# EAGLE board ATESLEME (EAGLE 9.6.2)
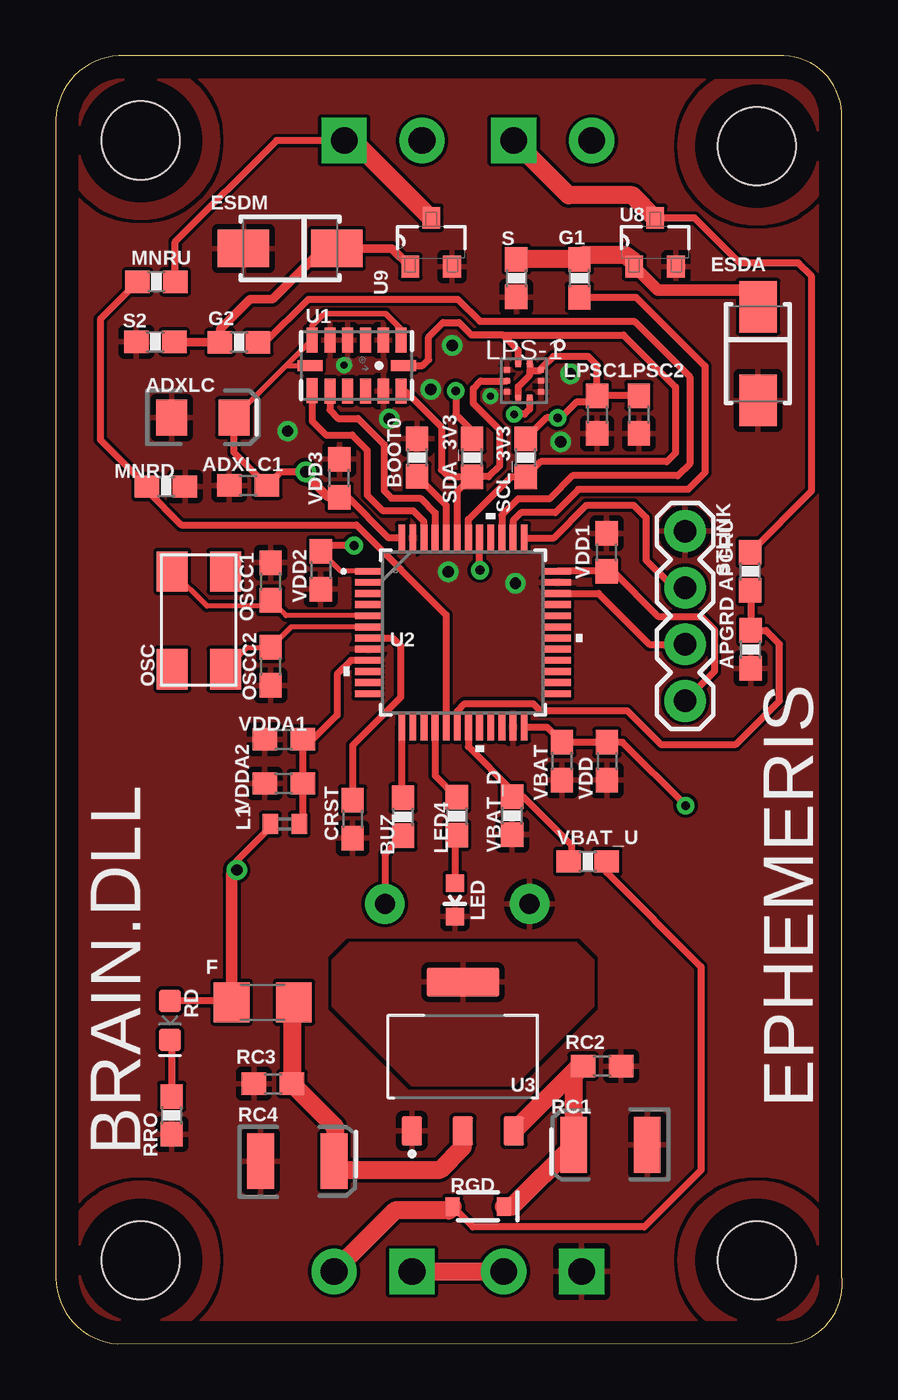
[diagram p0: board, top side]
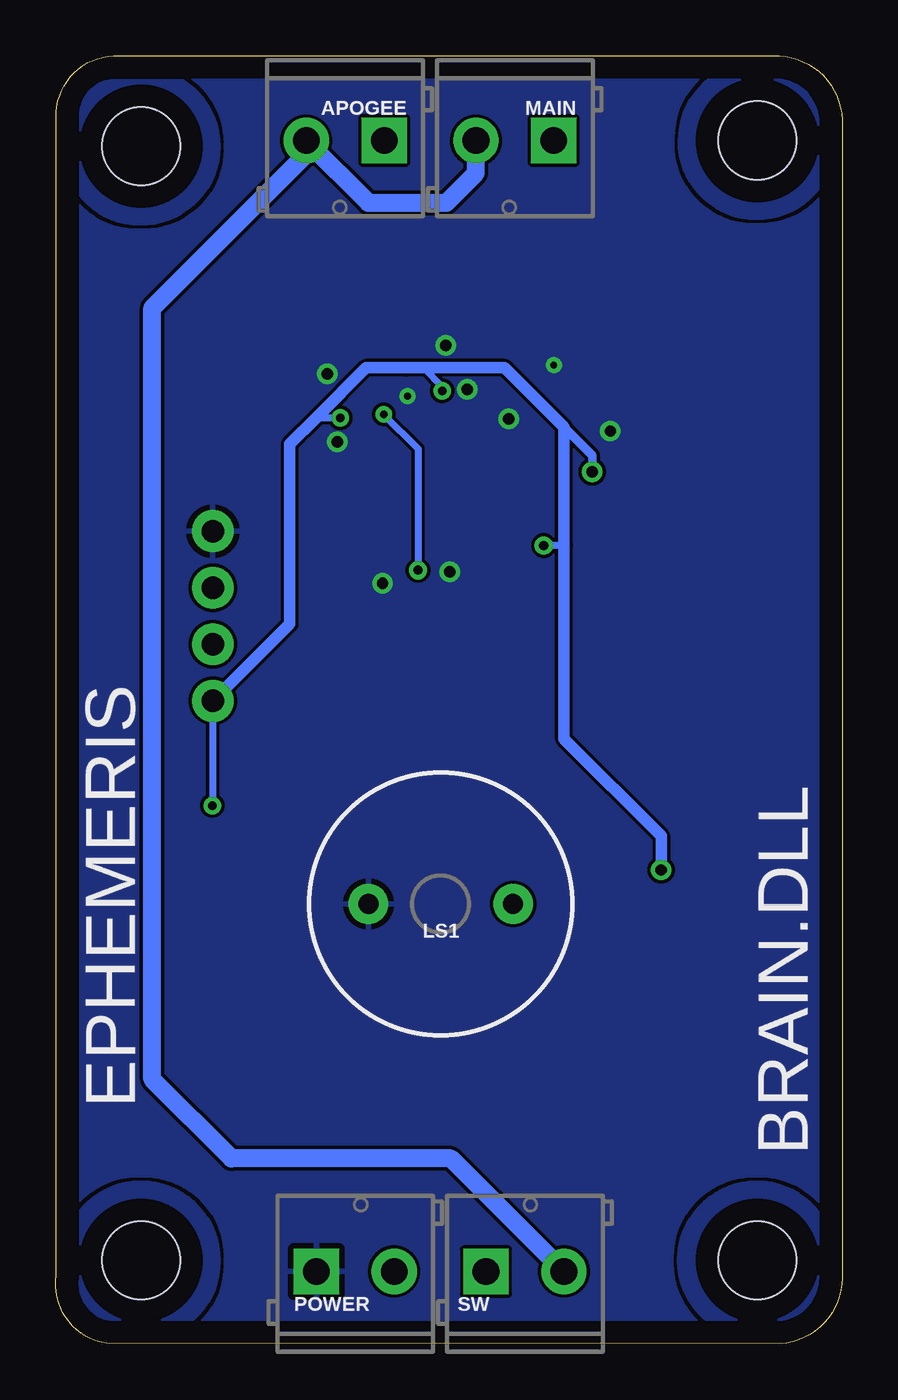
[diagram p1: board, bottom side, seen from below]

Size 35.34 x 57.86 mm. Coordinates in mm from the lower left corner, seen from the top.
Outline: 0.01,54.99 0.01,3.23 arc90 2.78,0 33.05,0.03 arc90 35.31,3.07 35.31,55.07 arc90 32.72,57.86 3.11,57.86 arc90 0.01,54.99
Copper layers (1*16): Top 0.035mm / dielectric 1.5mm / Bottom 0.035mm
Design rules "default": minimum track width 6mil, minimum drill 0.35mm, track to track 6mil, track to pad 6mil, pad to pad 6mil, via to via 6mil, smd to smd 6mil, copper to edge 40mil, drill to drill 6mil, minimum pad ring 10mil, minimum via ring 8mil, stop-mask expansion 4mil, vias tented up to drill 0mil, thermal gap 10mil
Holes 3.5 mm at 31.5,3.75 3.82,3.75 3.82,54.05 31.5,53.8

## Footprints (pad centres in the part's own frame; a part is rotated, then mirrored left to right if it is on the bottom)
EIA3216 = smd 1.4 x 1.6: + 1.4,0; - -1.4,0
0603 = smd 1.1 x 1: 1 -0.85,0; 2 0.85,0
0603-RES = smd 1.1 x 1: 1 -0.85,0; 2 0.85,0
SCREWTERMINAL-3.5MM-2-NS = drill 1.2 pad 2.032 square: 1 0,0 | drill 1.2 pad 2.032: 2 3.5,0
WE-TVSP_DO-214AC_UNIDIRECTIONAL = smd 2.3 x 1.7: 1 -2.1,0; 2 2.1,0
1206 = smd 1.6 x 1.8: 1 -1.4,0; 2 1.4,0
0402 = smd 0.7 x 0.9: 1 -0.65,0; 2 0.65,0
LED-0603 = smd 0.8 x 0.8: A 0,-0.75; C 0,0.75
LPS22H = smd 0.25 x 0.275: 1 -0.25,-0.762; 2 0.25,-0.762; 6 0.25,0.762; 7 -0.25,0.762 | smd 0.275 x 0.25: 3 0.762,-0.5; 4 0.762,0; 5 0.762,0.5; 8 -0.762,0.5; 9 -0.762,0; 10 -0.762,-0.5
BUZZER-12MM = drill 0.9 pad 1.778: + 3.25,0; - -3.25,0
ABMM2-8.000MHZ-E2-T = smd 1.803 x 1.397: GND@0 -2.159,1.118; GND@1 2.235,-1.27; OUT -2.159,-1.27; ıN 2.235,1.118
EIA3528 = smd 1.2 x 2.5: A 1.65,0; C -1.65,0
LED-0603' = smd 1 x 1: A -0.877,0; C 0.877,0
SOD-323 = smd 0.63 x 0.83: A 1.15,0; C -1.15,0
1X04 = drill 1.016 pad 1.88: 1 0,0; 2 2.54,0; 3 5.08,0; 4 7.62,0
LGA14_1:1_PATRICK = smd 0.5 x 1.124: 1 2,1.138; 2 1.2,1.138; 3 0.4,1.138; 4 -0.4,1.138; 5 -1.2,1.138; 6 -2,1.138; 8 -2,-1.13; 9 -1.2,-1.138; 10 -0.4,-1.138; 11 0.4,-1.138; 12 1.2,-1.138; 13 2,-1.138 | smd 1.124 x 0.5: 7 -2.1,0; 14 2.1,0
LQFP48-7X7MM = smd 1.194 x 0.305: 1 -4.25,2.75; 2 -4.25,2.25; 3 -4.25,1.75; 4 -4.25,1.25; 5 -4.25,0.75; 6 -4.25,0.25; 7 -4.25,-0.25; 8 -4.25,-0.75; 9 -4.25,-1.25; 10 -4.25,-1.75; 11 -4.25,-2.25; 12 -4.25,-2.75; 25 4.25,-2.75; 26 4.25,-2.25; 27 4.25,-1.75; 28 4.25,-1.25; 29 4.25,-0.75; 30 4.25,-0.25; 31 4.25,0.25; 32 4.25,0.75; 33 4.25,1.25; 34 4.25,1.75; 35 4.25,2.25; 36 4.25,2.75 | smd 0.305 x 1.194: 13 -2.75,-4.25; 14 -2.25,-4.25; 15 -1.75,-4.25; 16 -1.25,-4.25; 17 -0.75,-4.25; 18 -0.25,-4.25; 19 0.25,-4.25; 20 0.75,-4.25; 21 1.25,-4.25; 22 1.75,-4.25; 23 2.25,-4.25; 24 2.75,-4.25; 37 2.75,4.25; 38 2.25,4.25; 39 1.75,4.25; 40 1.25,4.25; 41 0.75,4.25; 42 0.25,4.25; 43 -0.25,4.25; 44 -0.75,4.25; 45 -1.25,4.25; 46 -1.75,4.25; 47 -2.25,4.25; 48 -2.75,4.25
SOT229P700X180-4N = smd 0.93 x 1.31: 1 -2.29,-3.345; 2 0,-3.345; 3 2.29,-3.345 | smd 3.24 x 1.31: 4 0,3.345
SOT95P240X112-3N = smd 0.972 x 0.802: D 1.092,0; G -1.092,0.94; S -1.092,-0.94

## Placement (x,y rotation side)
ADXLC  0.1uF  [EIA3216]  6.61,41.61 0 top
ADXLC1  10uF  [0603]  8.64,38.56 180 top
APGRD  3.3k  [0603-RES]  31.22,31.19 90 top
APGRU  10k  [0603-RES]  31.2,34.7 90 top
APOGEE  [SCREWTERMINAL-3.5MM-2-NS]  20.58,54.05 180 bottom
BOOT0  10k  [0603-RES]  16.24,39.81 270 top
BUZ  22R  [0603-RES]  15.6,23.67 270 top
CRST  100nF  [0603]  13.34,23.57 270 top
ESDA  12V  [WE-TVSP_DO-214AC_UNIDIRECTIONAL]  31.56,44.48 270 top
ESDM  12V  [WE-TVSP_DO-214AC_UNIDIRECTIONAL]  10.54,49.2 180 top
F  0.75A  [1206]  9.3,15.34 180 top
G1  20  [0603-RES]  23.53,47.86 270 top
G2  20  [0603-RES]  8.24,44.98 0 top
L1  BLM15HB221SN1  [0402]  10.3,23.34 0 top
LED  GREEN  [LED-0603]  17.94,19.94 180 top
LED4  1k  [0603-RES]  18.02,23.7 270 top
LPS-1  LPS22  [LPS22H]  21.04,43.26 180 top
LPSC1  4.7uF  [0603]  24.32,41.74 270 top
LPSC2  100nF  [0603]  26.2,41.74 270 top
LS1  BUZZER-PTH  [BUZZER-12MM]  18.04,19.76 0 bottom
MAIN  [SCREWTERMINAL-3.5MM-2-NS]  12.96,54.05 180 bottom
MNRD  3.3k  [0603-RES]  4.96,38.51 180 top
MNRU  10k  [0603-RES]  4.53,47.7 0 top
OSC  [ABMM2-8.000MHZ-E2-T]  6.36,32.46 90 top
OSCC1  25pF  [0603]  9.66,34.24 90 top
OSCC2  25pF  [0603]  9.66,30.43 270 top
POWER  [SCREWTERMINAL-3.5MM-2-NS]  23.63,3.25 0 bottom
RC1  22uF  [EIA3528]  24.93,8.94 180 top
RC2  100nF  [0603]  24.54,12.47 0 top
RC3  100nF  [0603]  9.76,11.68 180 top
RC4  22uF  [EIA3528]  10.85,8.2 0 top
RD  Red  [LED-0603']  5.14,14.53 270 top
RGD  1A/23V  [SOD-323]  18.98,6.17 180 top
RRO  1.5k  [0603-RES]  5.22,10.26 270 top
S  3.3k  [0603-RES]  20.7,47.87 270 top
S2  3.3k  [0603-RES]  4.48,45.01 180 top
SCL_3V3  4.7k  [0603-RES]  21.12,39.8 90 top
SDA_3V3  4.7k  [0603-RES]  18.7,39.8 90 top
STLINK  [1X04]  28.28,36.5 270 top
SW  [SCREWTERMINAL-3.5MM-2-NS]  16.01,3.25 0 bottom
U1  ADXL345PATRICK  [LGA14_1:1_PATRICK]  13.52,43.94 0 top
U2  [LQFP48-7X7MM]  18.3,31.95 0 top
U3  AMS1117-3.3  [SOT229P700X180-4N]  18.3,12.9 0 top
U8  [SOT95P240X112-3N]  26.93,49.48 90 top
U9  [SOT95P240X112-3N]  16.87,49.48 90 top
VBAT  100nF  [0603]  22.75,26.17 270 top
VBAT_D  3.3k  [0603-RES]  20.51,23.72 90 top
VBAT_U  10k  [0603-RES]  23.91,21.67 0 top
VDD  4.7uF  [0603]  24.77,26.17 270 top
VDD1  100nF  [0603]  24.75,35.55 90 top
VDD2  100nF  [0603]  11.91,34.75 270 top
VDD3  100nF  [0603]  12.75,38.88 90 top
VDDA1  1uF  [0603]  10.24,27.15 180 top
VDDA2  100nF  [0603]  10.24,25.17 180 top

## Library data of the parts
ADXLC = SparkFun-Capacitors; PROD_ID: CAP-00811
ADXLC1 CRST LPSC1 LPSC2 OSCC1 OSCC2 RC2 RC3 VBAT VDD VDD1-VDD3 VDDA1 VDDA2 = SparkFun-Capacitors; PROD_ID: CAP-00810
APGRD APGRU BOOT0 BUZ G1 G2 LED4 MNRD MNRU RRO S S2 SCL_3V3 SDA_3V3 VBAT_D VBAT_U = SparkFun-Resistors; PROD_ID: RES-08296
APOGEE MAIN POWER SW = SparkFun-Connectors; PROD_ID: CONN-08399
ESDA ESDM = Wurth_EMC Components_WE-TVSP; DATASHEET-URL: https://www.we-online.com/catalog/datasheet/824500102.pdf; IPEAK: 2.5A; MOUNT: SMT; PART-NUMBER: 824500102; PDISS: 400W; VBR: 117V; VCLAMP: 162V
F = SparkFun-Fuses; PROD_ID: RES-11150
L1 = inductors
LED = SparkFun-LED; PROD_ID: DIO-00819
LPS-1 = Arduino-Sensors; CODE-ARDUINO: A5390; DATASHEET: https://www.st.com/content/ccc/resource/technical/document/datasheet/bf/c1/4f/23/61/17/44/8a/DM00140895.pdf/files/DM00140895.pdf/jcr:content/translations/en.DM00140895.pdf; DISTRIBUTOR-LINK: https://www.digikey.com/product-detail/en/stmicroelectronics/LPS22HBTR/497-16265-1-ND/5799917; DISTRIBUTOR-PN: 497-16265-1-ND; MANUFACTURER: ST; MANUFACTURER-PN: LPS22HBTR
LS1 = SparkFun-Electromechanical; PROD_ID: COMP-08253; SF_SKU: COM-07950
OSC = ABMM2-8.000MHZ-E2-T
RC1 RC4 = SparkFun-Capacitors; PROD_ID: CAP-08063
RD = SparkFun-LED; PROD_ID: DIO-11154
RGD = SparkFun-DiscreteSemi; PROD_ID: DIO-11623
STLINK = SparkFun-Connectors; PROD_ID: CONN-09696
U1 = Testing
U2 = STM32F103C8T6; BUILT_BY: EMA_UL_Team; COPYRIGHT: Copyright (C) 2018 Accelerated Designs. All rights reserved; MANUFACTURER_PART_NUMBER: STM32F103C8T6; SOURCELIBRARY: Updates_to_database_2020-10-19; VENDOR: STMicroelectronics
U3 = AMS1117-3.3; AVAILABILITY: Unavailable; DESCRIPTION: Sot223/Pkg 1-Amp 3.3-Volt Low Drop Out Voltage Regulatator; MF: Advanced Monolithic Systems; MP: AMS1117-3.3; PACKAGE: SOT-89 ams; PRICE: None
U8 U9 = IRLML6344TRPBF; AVAILABILITY: Good; DESCRIPTION: N-Channel 30V 5A (Ta) 1.3W (Ta) Surface Mount Micro3™/SOT-23; MF: Infineon Technologies; MP: IRLML6344TRPBF; PACKAGE: SOT-23 Multicomp; PRICE: None; PURCHASE-URL: https://pricing.snapeda.com/search/part/IRLML6344TRPBF/?ref=eda

## Nets
3.3V: ADXLC1.1 ADXLC.+ F.2 L1.1 LPS-1.1 LPS-1.6 LPS-1.10 LPSC1.1 LPSC2.1 RD.A SCL_3V3.2 SDA_3V3.2 STLINK.4 U1.1 U1.6 U1.7 U2.1 U2.24 U2.36 U2.48 VBAT.1 VDD1.1 VDD2.1 VDD3.1 VDD.1
APG: G1.2 U2.38
BOOT0: BOOT0.2 U2.44
BUZZER: BUZ.1 U2.13
GND: ADXLC1.2 ADXLC.- APGRD.1 BOOT0.1 CRST.2 ESDA.2 ESDM.2 LED.C LPS-1.3 LPS-1.5 LPS-1.8 LPS-1.9 LPSC1.2 LPSC2.2 LS1.- MNRD.1 OSCC1.2 OSCC2.2 POWER.1 RC1.C RC2.2 RC3.2 RC4.C RRO.2 S2.2 S.2 STLINK.1 U1.2 U1.4 U1.5 U1.12 U2.8 U2.23 U2.35 U2.47 U3.1 U8.S U9.S VBAT.2 VBAT_D.1 VDD1.2 VDD2.2 VDD3.2 VDD.2 VDDA1.2 VDDA2.2
HT: U3.4
IN1: U1.8 U2.46
IN2: U1.9 U2.45
INT1: LPS-1.7 U2.41
LED: LED4.1 U2.16
MN: G2.2 U2.39
N$1: F.1 RC3.1 RC4.A U3.2
N$2: RD.C RRO.1
N$8: ESDM.1 G2.1 S2.1 U9.G
N$10: LED4.2 LED.A
N$13: BUZ.2 LS1.+
N$14: ESDA.1 G1.1 S.1 U8.G
NRST: CRST.1 U2.7
OSC_OUT: OSC.OUT OSCC2.1 U2.6
OSC_ıN: OSC.ıN OSCC1.1 U2.5
PC13: U2.2
SCL_3V3: LPS-1.2 SCL_3V3.1 U1.14 U2.42
SDA_3V3: LPS-1.4 SDA_3V3.1 U1.13 U2.43
SWCLK: STLINK.2 U2.37
SWDIO: STLINK.3 U2.34
VAPG: APGRU.2 APOGEE.1 U8.D
VAPGS: APGRD.2 APGRU.1 U2.18
VCC: POWER.2 SW.1
VDDA: L1.2 U2.9 VDDA1.1 VDDA2.1
VIN: APOGEE.2 MAIN.2 RGD.A SW.2 VBAT_U.2
VMN: MAIN.1 MNRU.2 U9.D
VMNS: MNRD.2 MNRU.1 U2.17
VNR: RC1.A RC2.1 RGD.C U3.3
VSENS: U2.19 VBAT_D.2 VBAT_U.1

## Tracks (layer width: path | path; a pad name or v marks a point on that pad's centre or on a via)
3.3V  (via drill 0.38, 0.41, 0.51)
  Top 0.152: 21.75,43.7 LPS-1.10 21.8,43.8 | LPS-1.1 21.3,44.01
  Top 0.229: U2.1 12.81,34.7 VDD2.1 | U1.7 10.35,43.94 ADXLC.+ 11.49,45.08 U1.6
  Top 0.254: U1.1 15.52,45.59 14.83,46.28 12.06,46.28 11.52,45.74 U1.6
  Top 0.305: F.2 7.84,15.41 RD.A | U2.48 14.96,36.2 13.13,38.03 VDD3.1 | 21.3,43.7 21.75,43.7 | v17.98,42.81 17.98,41.75 18.7,41.02 SDA_3V3.2 | SCL_3V3.2 22.06,41.6 v22.55,41.6 22.62,41.52 23.39,42.29 24.02,42.29 LPSC1.1 | LPSC2.1 LPSC1.1 | U2.36 24.74,34.71 VDD1.1 25.04,34.7 27.06,32.68 29,32.68 29.6,32.08 29.6,30.2 STLINK.4 | U2.24 22.07,27.7 VBAT.1 22.76,27.02 VDD.1 25.46,27.02 v28.3,24.18 | v11.24,39.17 10.1,39.17 ADXLC1.1 8.01,40.04 ADXLC.+ | 21.8,43.8 22.35,44.35 23.93,44.35 24.32,43.96 LPSC1.1 | LPS-1.6 20.79,43.01 21.3,43.52 21.3,43.7 | 21.3,44.01 21.3,43.7 | v8.14,21.29 8.14,21.69 9.65,23.2 | v13.41,35.86 12.17,35.86 VDD2.1
  Top 0.381: VDD3.1 12.24,38.03 11.24,39.03 v11.24,39.17
  Top 0.508: v8.14,21.29 7.9,21.05 F.2 | 9.65,23.2 L1.1
  Bottom 0.305: 23.63,41.61 22.76,41.61 22.75,41.6 v22.55,41.6 | v28.3,24.18 28.28,24.21 STLINK.4 | 12.51,35.86 v13.41,35.86 | v17.98,42.81 17.98,43 18.82,43.84 19.62,43.84
  Bottom 0.381: v11.24,39.17 11.24,39.9 12.51,41.17
  Bottom 0.508: v8.14,21.29 8.14,22.81 12.51,27.18 12.51,35.86 12.51,41.17 15.17,43.84 19.62,43.84 21.4,43.84 23.63,41.61 24.82,40.41 24.82,32.33 STLINK.4
APG
  Top 0.305: U2.38 20.55,36.97 20.91,37.34 22.45,37.34 23.48,38.37 28.4,38.37 29.17,39.14 29.17,43.92 26.07,47.01 G1.2
BOOT0
  Top 0.305: BOOT0.2 16.26,38.96 17.55,37.67 U2.44
BUZZER
  Top 0.305: U2.13 15.55,24.58 BUZ.1
D
  pour Top: 0.31,54.05 arc-90 3.82,57.56 arc-90 7.32,54.03 arc-90 3.84,50.55 arc-90
  pour Top: 28,53.8 arc-90 31.53,57.3 arc-90 35.01,53.77 arc-90 31.5,50.29 arc-90
  pour Top: 28,3.76 arc-90 31.53,7.26 arc-90 35.01,3.78 arc-90 31.48,0.25 arc-90
  pour Top: 0.31,3.76 arc-90 3.82,7.26 arc-90 7.32,3.76 arc-90 3.82,0.25 arc-90
  pour Bottom: 35.01,3.78 arc90 31.53,7.26 31.5,7.26 arc90 28,3.76 28,3.71 arc90 31.45,0.25 31.48,0.25 arc90
  pour Bottom: 7.36,3.75 arc90 3.82,7.26 arc90 0.34,3.73 arc90 3.87,0.26 arc90
  pour Bottom: 7.32,54.03 arc90 3.79,57.56 arc90 0.31,54.05 arc90 3.87,50.55 arc90
  pour Bottom: 35.01,53.82 arc90 31.53,57.3 arc90 28,53.77 arc90 31.56,50.29 arc90
GND  (via drill 0.3, 0.51)
  other vias: 19.53,42.57 22.69,40.51 23.13,43.57 16.85,42.88 14.99,41.55 17.82,44.85 17.64,34.67 20.66,34.16 12.96,43.97 10.42,41
  pour Top (rank 2): -2.02,59.89 -2.02,-2.84 38.87,-2.84 38.87,59.89
  pour Bottom (rank 2): -3.29,61.42 -3.29,-4.62 40.39,-4.62 40.39,61.42
HT
  pour Top: 16.01,11.63 20.58,11.63 24.14,15.19 24.14,17.22 23.38,17.98 13.22,17.98 12.45,17.22 12.45,15.19
IN1
  Top 0.152: U2.46
  Top 0.305: U1.8 11.52,41.45 12.15,40.82 13.32,40.82 14.01,40.13 14.01,38.11 14.71,37.41 16.08,37.41 16.54,36.94 U2.46
IN2
  Top 0.305: U1.9 12.32,41.94 12.69,41.57 13.58,41.57 14.75,40.39 14.75,38.32 15.09,37.99 16.38,37.99 17.05,37.32 U2.45
INT1  (via drill 0.35, 0.41)
  Top 0.152: LPS-1.7 | v20.6,41.75 20.61,41.76 | v19.06,34.75 19.05,34.76
  Top 0.305: LPS-1.7 21.29,41.98 21.06,41.76 20.61,41.76 | 19.05,34.76 U2.41
  Bottom 0.305: v20.6,41.75 19.06,40.21 v19.06,34.75
LED
  Top 0.305: U2.16 17.05,25.52 LED4.1
MN
  Top 0.305: U2.39 20.05,37.22 20.78,37.95 22.18,37.95 23.22,38.99 27.95,38.99 28.48,39.52 28.48,43.43 25.99,45.93 19.06,45.93 18.06,46.92 11.35,46.92 9.42,44.98 G2.2
N$1
  Top 0.813: F.1 10.61,15.25 RC3.1 12.54,9.75 12.54,8.24 RC4.A 12.89,7.82 17.28,7.82 18.3,8.84 U3.2
N$2
  Top 0.305: RD.C 5.22,13.58 RRO.1
N$8
  Top 0.381: S2.1 5.35,44.98 G2.1 7.39,45.57 8.74,46.92 9.74,46.92 12.02,49.2 ESDM.1 15.12,49.2 U9.G
N$10
  Top 0.229: LED4.2 17.94,22.77
  Top 0.305: 17.94,22.77 LED.A
N$13
  Top 0.305: BUZ.2 14.79,22.01 LS1.+
N$14
  Top 0.508: U8.G 27.05,47.33 30.8,47.33 ESDA.1
  Top 0.813: U8.G 25.99,48.61 25.59,48.91 23.72,48.91 G1.1 S.1
NRST
  Top 0.229: U2.7
  Top 0.305: U2.7 15.15,31.7 15.5,31.35 15.5,29.04 13.34,26.88 CRST.1
OSC_OUT
  Top 0.229: OSC.OUT 8.61,31.28 OSCC2.1 10.58,32.2 U2.6
OSC_ıN
  Top 0.229: OSC.ıN 6.8,33.14 9.41,33.14 OSCC1.1 10.35,32.7 U2.5
SCL_3V3
  Top 0.305: U2.42 18.55,37.03 20.47,38.95 SCL_3V3.1 21.79,39.63 27.46,39.63 27.85,40.02 27.85,42.98 25.52,45.31 20.09,45.31 | U1.14 16.49,43.94 16.75,44.21 16.75,45.22 17.41,45.87 18.12,45.87 18.66,45.33 20.08,45.33 20.09,45.31 | LPS-1.2 20.79,44.61 20.09,45.31
SDA_3V3
  Top 0.305: U2.43 18.05,38.3 SDA_3V3.1 | LPS-1.4 19.09,43.25 18.76,42.92 18.76,42.24 19.95,41.05 19.95,39.45 19.45,38.95 SDA_3V3.1 | U1.13 15.6,42.73 15.78,42.73 17.33,41.17 17.33,39.27 17.65,38.95 SDA_3V3.1
SWCLK
  Top 0.305: STLINK.2 27.77,33.96 26.52,35.2 26.52,37.12 25.97,37.67 23.85,37.67 22.38,36.2 U2.37
SWDIO
  Top 0.305: STLINK.3 26.68,31.42 24.39,33.7 U2.34
VAPG
  Top 0.305: APGRU.2 33.97,38.31 33.97,47.96 33.37,48.55 30.73,48.55 28.71,50.57 U8.D
  Top 0.813: U8.D 25.92,51.59 23.05,51.59 APOGEE.1
VAPGS
  Top 0.229: U2.18 | APGRU.1 31.22,33.82
  Top 0.305: U2.18 18.04,28.42 18.37,28.75 21.45,28.75 21.77,28.43 25.68,28.43 27.19,26.92 30.56,26.92 32.52,28.88 32.52,31.43 31.91,32.04 APGRD.2 31.22,33.82
VCC
  Top 0.813: SW.1 POWER.2
VDDA
  Top 0.229: U2.9 | 11.55,27.15 VDDA1.1 | L1.2 11.09,23.49
  Top 0.305: U2.9 13.26,30.7 12.64,30.08 12.64,28.24 11.55,27.15 | VDDA1.1 VDDA2.1 11.09,23.49
VIN
  Top 0.305: VBAT_U.2 24.76,21.17 28.99,16.94 28.99,7.8 26.45,5.26 18.75,5.26 RGD.A
  Top 0.813: SW.2 15.25,5.99 17.65,5.99 RGD.A
  Bottom 0.813: MAIN.2 16.46,52.58 17.79,51.26 21.29,51.26 APOGEE.2 24.08,53.44 31,46.53 31,11.89 27.44,8.33 17.59,8.33 SW.2
VMN
  Top 0.305: MNRU.2 5.38,49.51 9.92,54.05 MAIN.1
  Top 0.813: MAIN.1 13.39,54.05 U9.D
VMNS
  Top 0.229: MNRD.2 4.11,38.31
  Top 0.305: MNRD.2 2,40.61 2,46.02 MNRU.1 | U2.17 17.55,32.75 13.51,36.78 5.65,36.78 4.11,38.31
VNR
  Top 0.813: RGD.C 20.51,6.17 RC1.A 23.28,12.05 RC2.1 23.5,12.47 U3.3
VSENS
  Top 0.305: U2.19 18.55,26.83 20.51,24.87 VBAT_D.2 21.01,24.57 23.17,22.41 23.17,21.78 VBAT_U.1

## Text on the board
tPlace: BRAIN.DLL | EPHEMERIS
bPlace: BRAIN.DLL | EPHEMERIS